# Altium PCB DoubiBot_PCB.PcbDoc
Units mil, origin at the board's own origin, x right, y up, seen from the top; angles counter-clockwise.
Board outline 1350 x 1470 mil, 2 copper layers (Top1, Bottom4), stack 12.8 mil thick; 31 components, 29 nets, 139 pads, 98 vias.
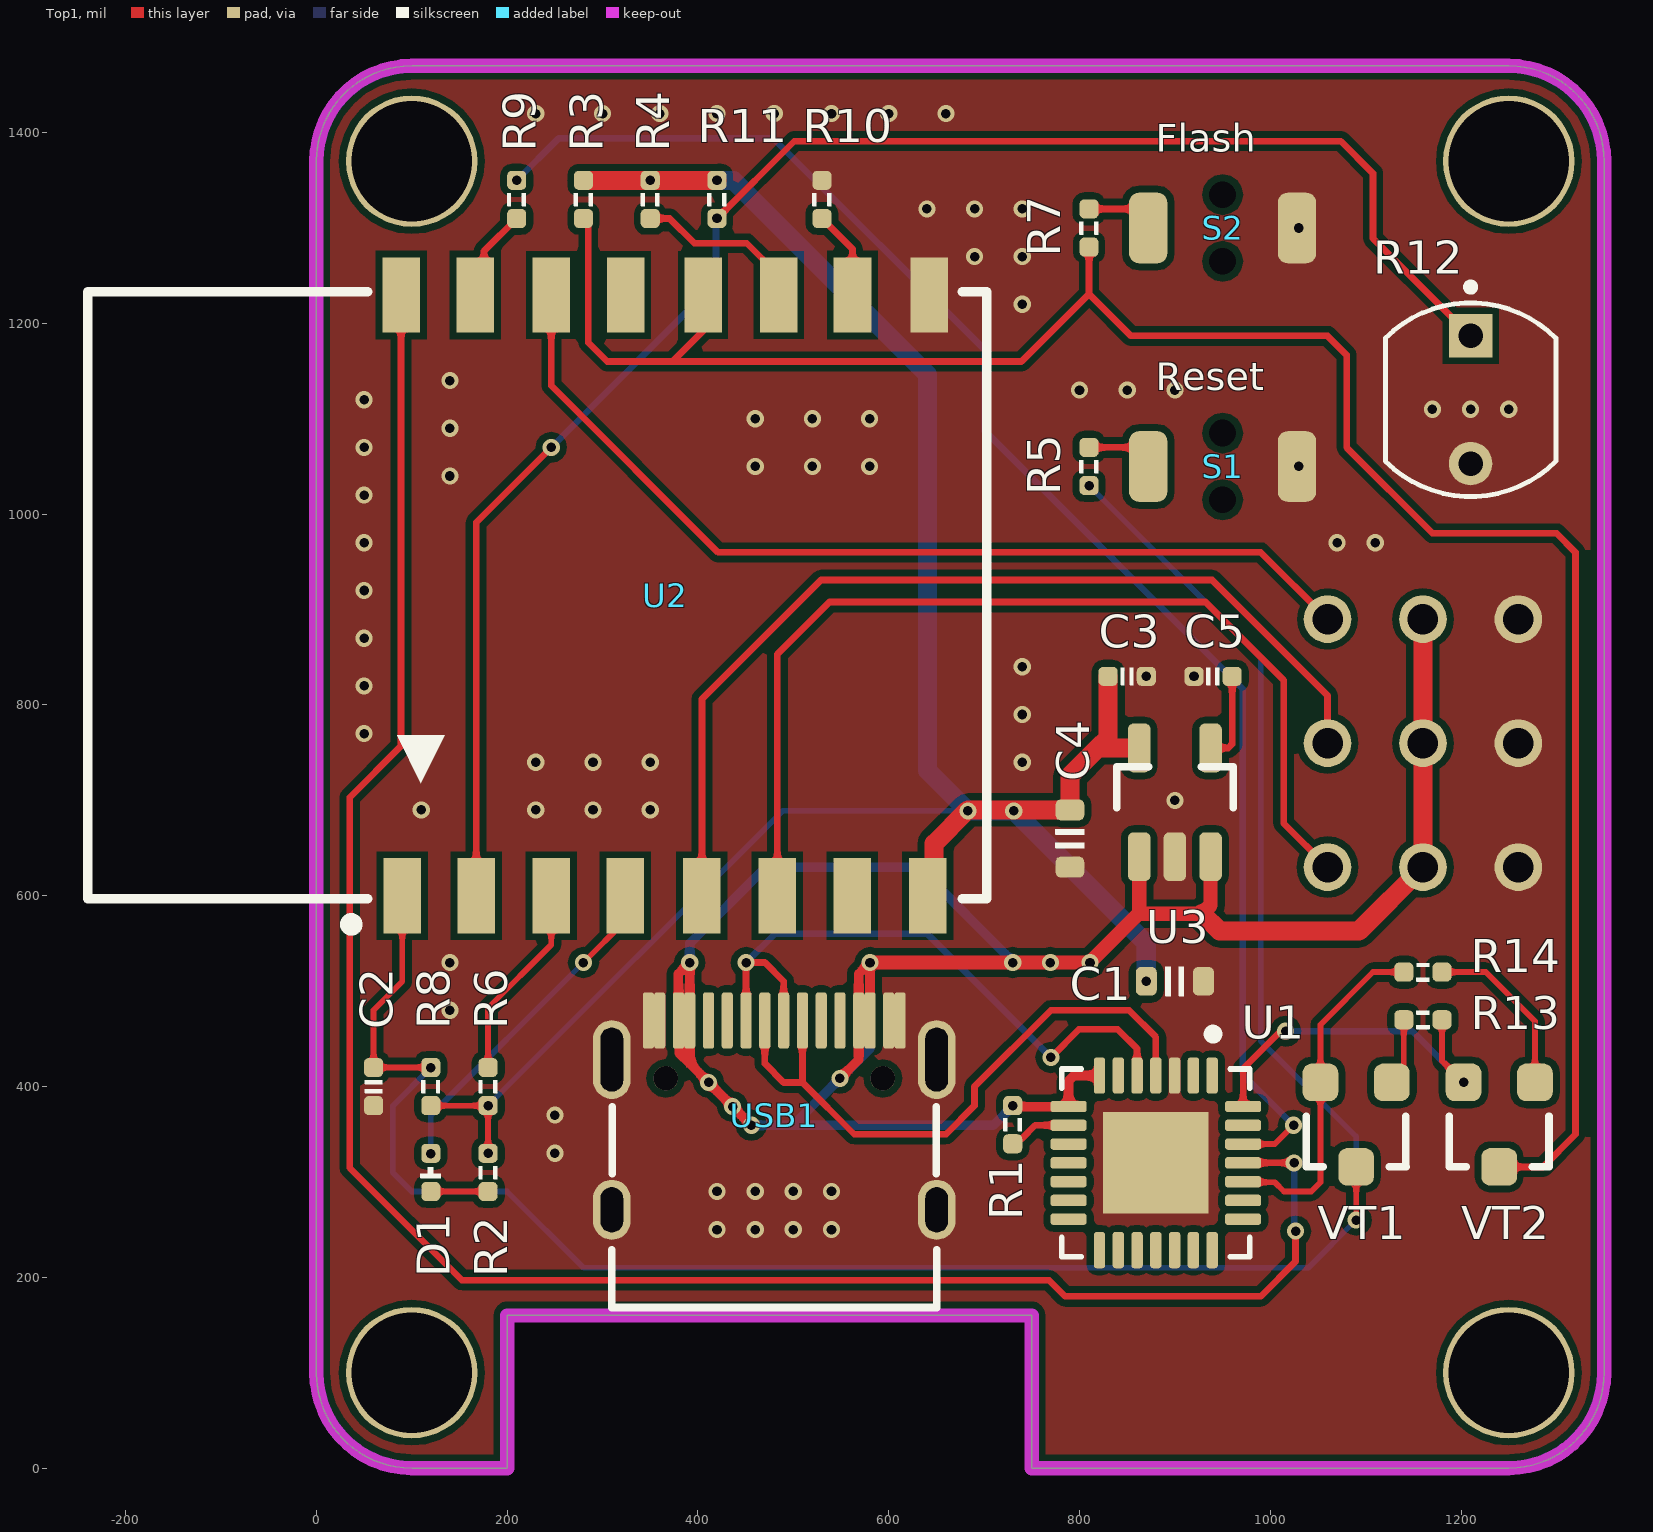
[diagram p0: Top1 view]
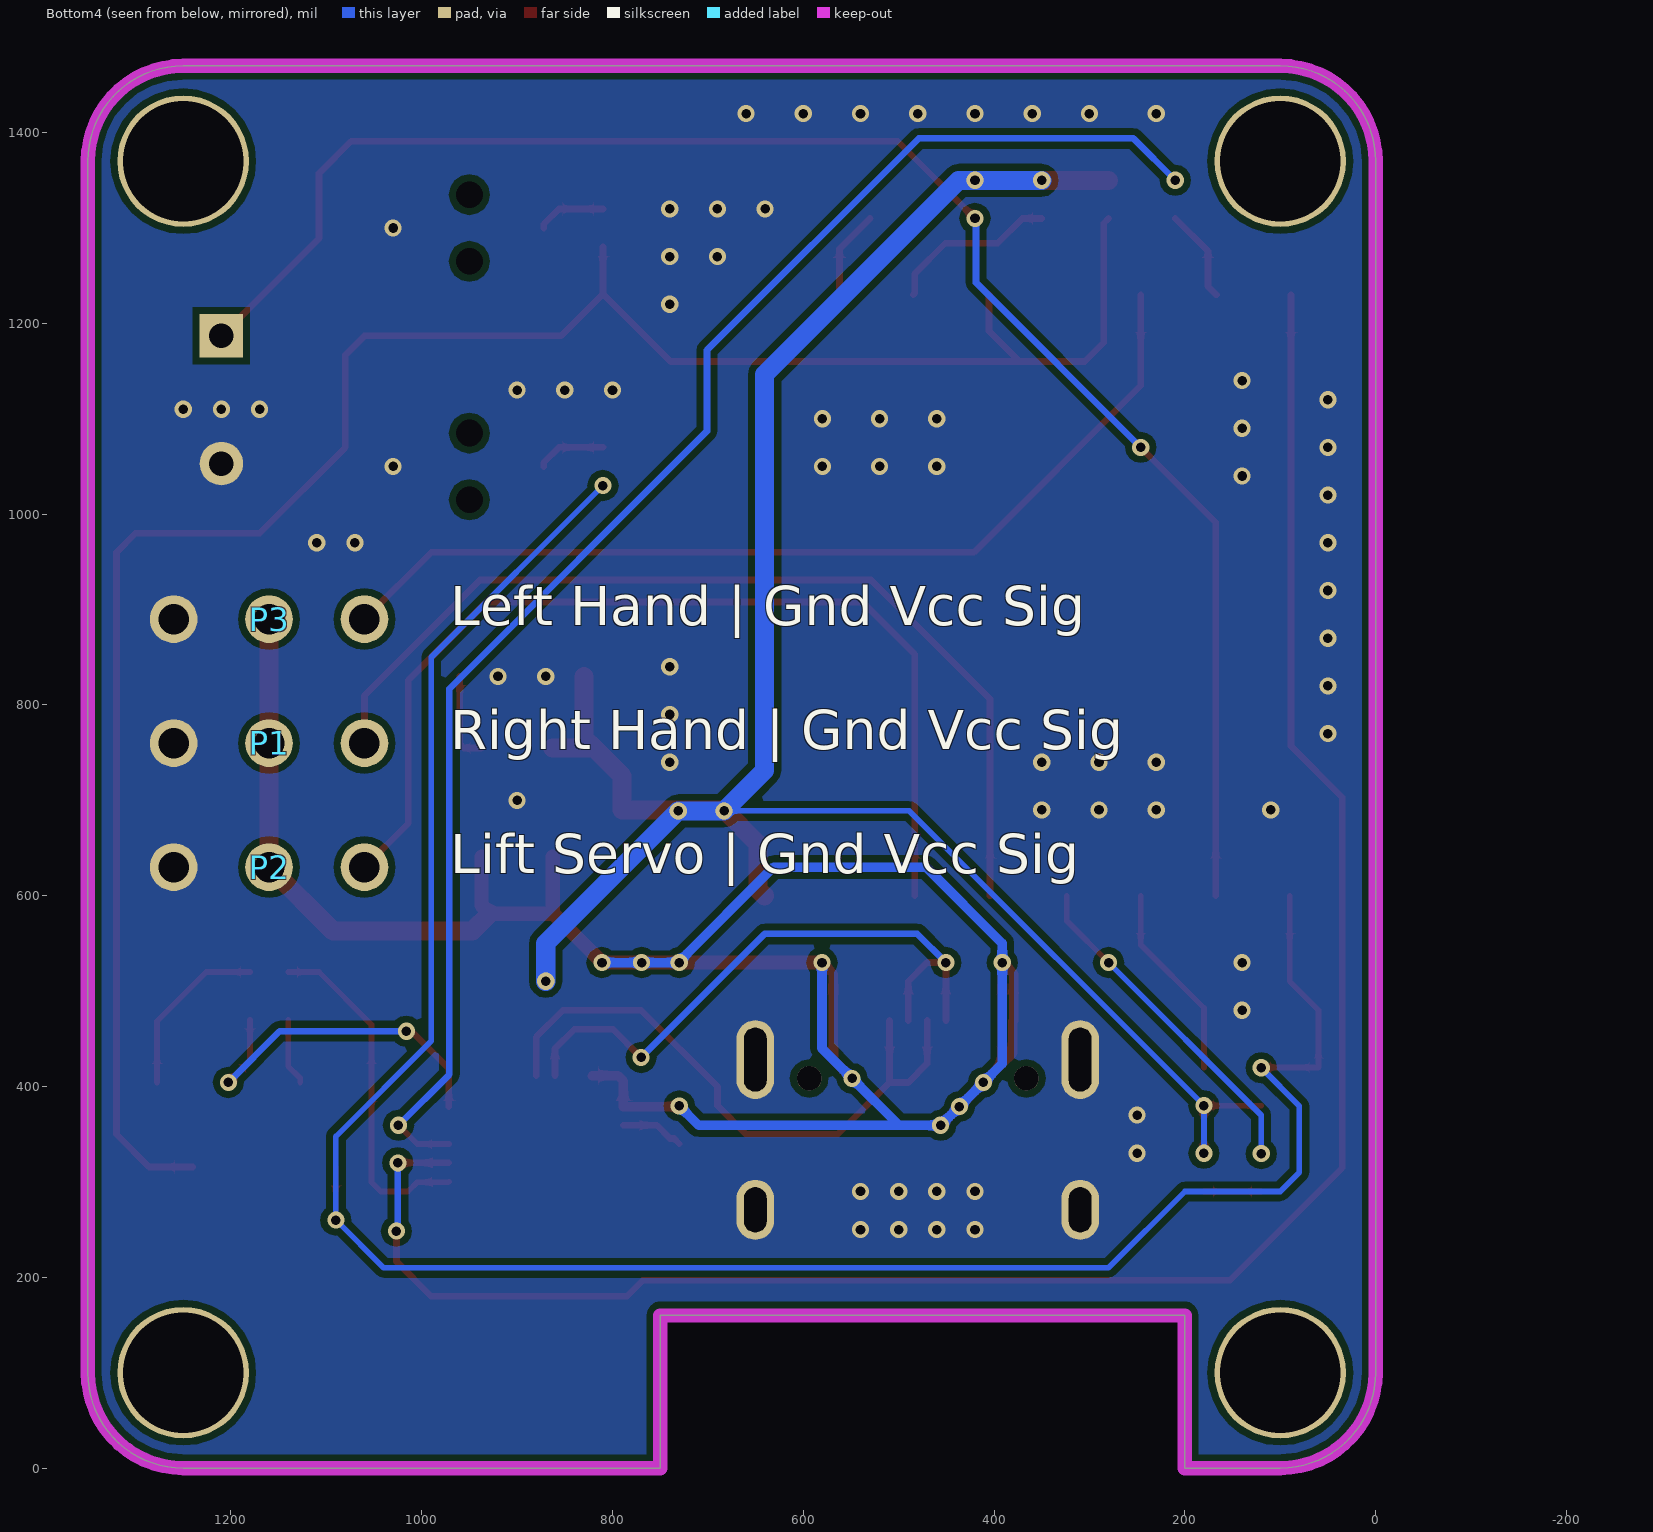
[diagram p1: Bottom4 view, seen from below]
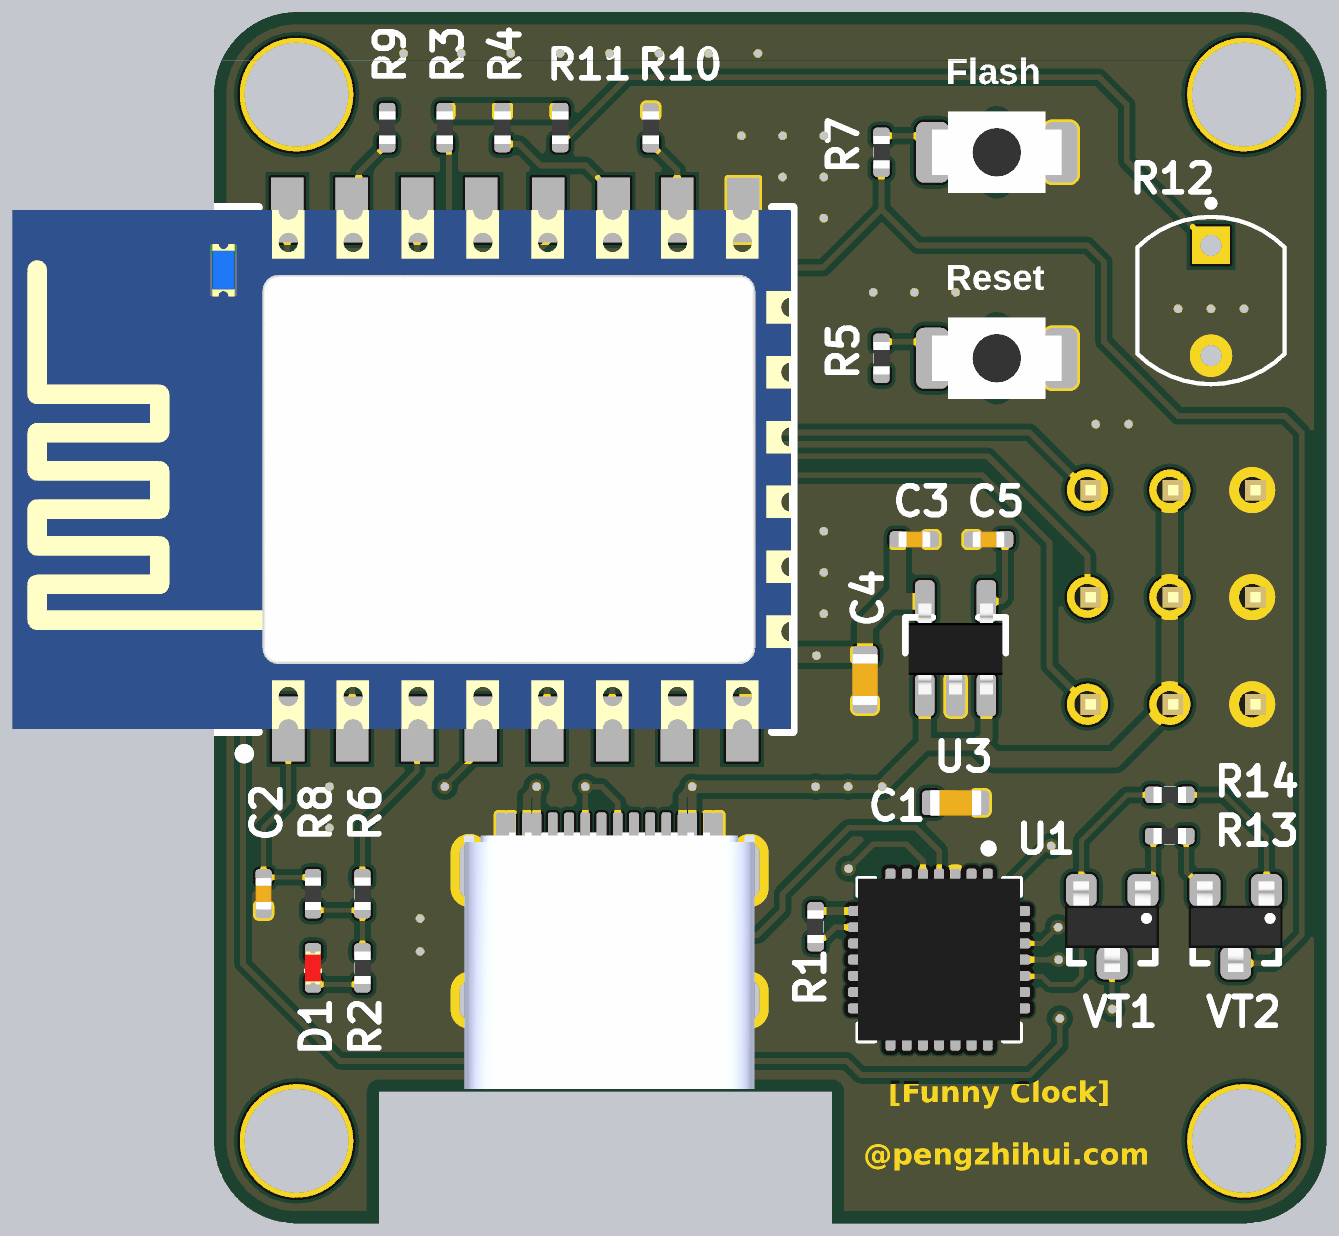
[diagram p2: 3D render of the assembled board from above, using the file's embedded part models]
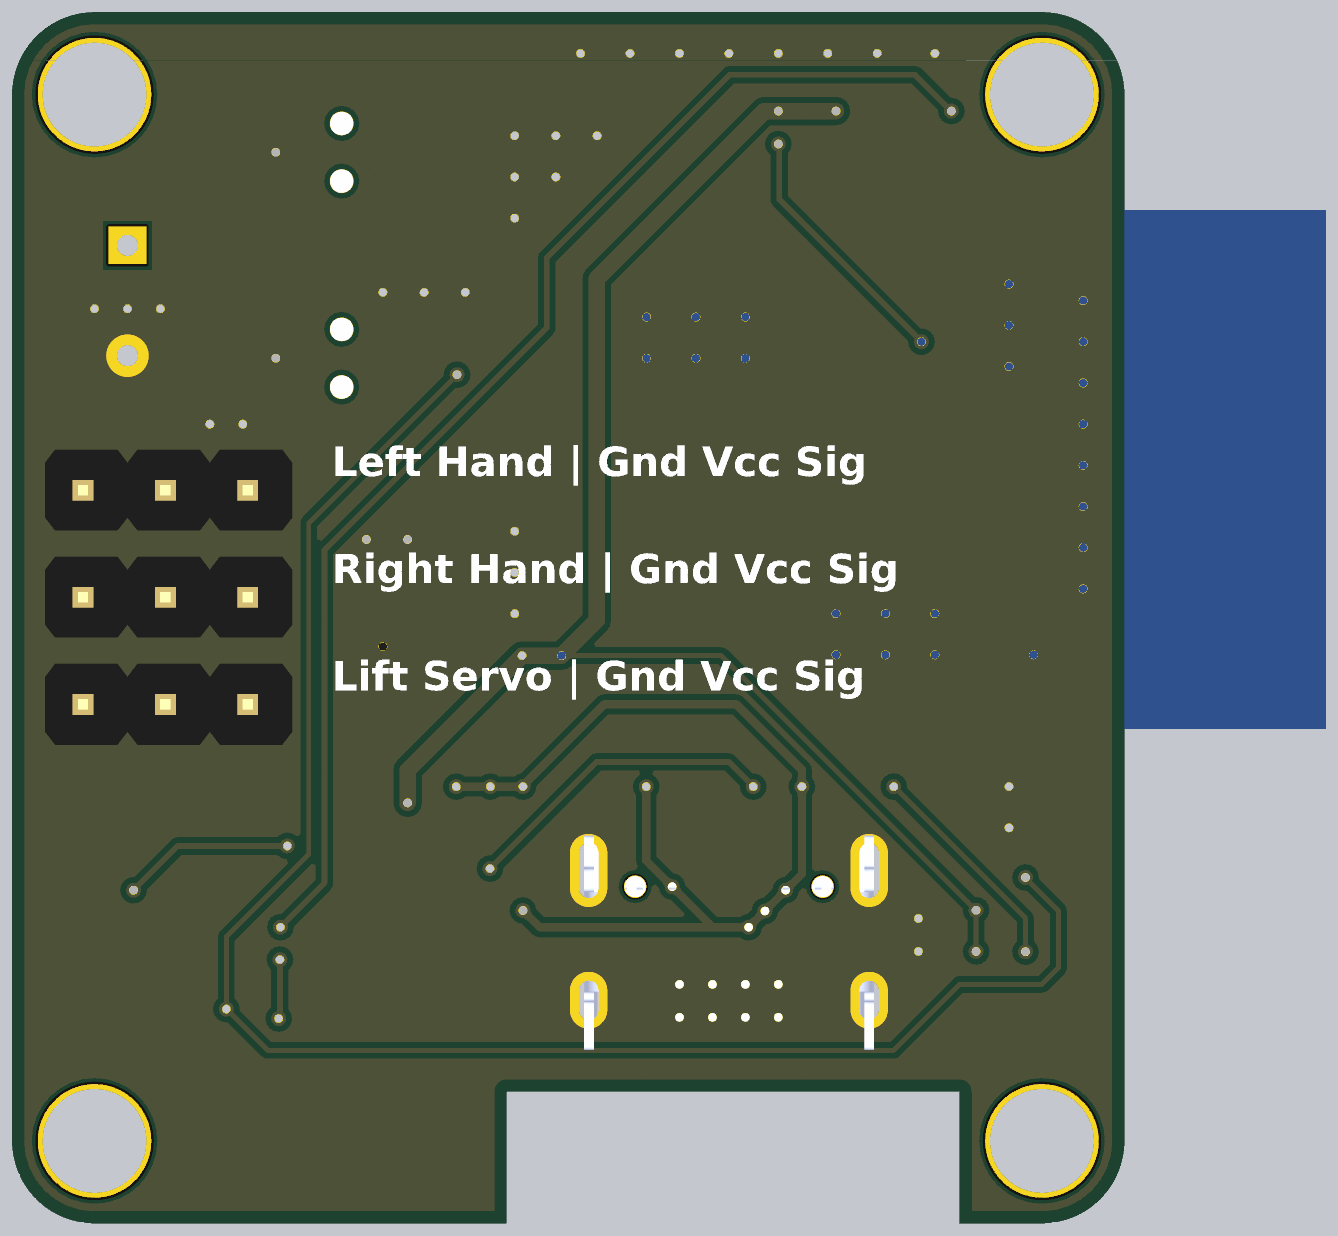
[diagram p3: 3D render of the assembled board from below, using the file's embedded part models]

## Layer stack, top to bottom
Top1: signal copper 1.4
Dielectric: core 10, FR-4, Dk 4.2
Bottom4: signal copper 1.4

## Board outline
0,100 ccw(c100,100) 100,0 200,0 200,160 750,160 750,0 1250,0 ccw(c1250,100) 1350,100 1350,1370 ccw(c1250,1370) 1250,1470 100,1470 ccw(c100,1370) 0,1370

## Design rules (kind name [scope] priority, off if disabled: settings)
Clearance [All] p1: gap=7
ComponentClearance [All] p1: gap=0 collisioncheckmode=3 verticalgap=0 showdistances=FALSE
DiffPairsRouting [All] p1: maxlimit=9 minlimit=9 mostfreqgap=9 maxuncoupledlength=500
FanoutControl Fanout_BGA [All] p1: bgadir=Out bgaviamode=Centered fanoutstyle=Auto fanoutdirection=Alternating viagrid=1 // Fanout_BGA (Default Rule)
HoleSize [All] p1: absolutevalues=TRUE maxlimit=10000 minlimit=8 maxpercent=80.000 minpercent=20.000
MinimumSolderMaskSliver [All] p1 off: minsoldermaskwidth=2
PlaneClearance [All] p1: clearance=8
PlaneConnect [All] p1: planeconnectstyle=Direct reliefexpansion=20 reliefentries=4 reliefconductorwidth=10 reliefairgap=10
PolygonConnect [All] p1: connectstyle=Direct reliefconductorwidth=10 reliefentries=4 polygonreliefangle="90 Angle"
RoutingVias [All] p1: holewidth=8 width=16 viastyle="Through Hole" minholewidth=6 minwidth=12 maxholewidth=28 maxwidth=50
SilkToSilkClearance [All] p1: silktosilkclearance=0
SilkscreenOverComponentPads SilkToSolderMaskClearance [IsPad] p1: minsilkscreentomaskgap=0
SolderMaskExpansion [All] p1: expansion=3
Width [All] p1: maxlimit=10000 minlimit=6 preferedwidth=7
19 further rules are at their usual default settings.

## Components (designator, comment, footprint, x,y, rotation, side; value= is the part's Value field where it differs from the comment)
C1 "10uF" 0603-CAP 900,510.32 r180 top
C2 "0.1uF" CAP_0402 60,400 r90 top
C3 "0.1uF" CAP_0402 850,830 r0 top
C4 "10uF" 0603-CAP 790,660 r270 top
C5 "10nF" CAP_0402 940,830 r0 top
D1 "LED_0402" LED_0402_RED 120,310 r90 top
P1 "HDR1x3_2.54" HDR1X3_2.54_180 1060,760 r270 bottom
P2 "HDR1x3_2.54" HDR1X3_2.54_180 1060,630 r270 bottom
P3 "HDR1x3_2.54" HDR1X3_2.54_180 1060,890 r270 bottom
R1 "10K" RES_0402 730,360 r90 top
R2 "1K" RES_0402 180,310 r90 top
R3 "12K" RES_0402 280,1330 r270 top
R4 "12K" RES_0402 350,1330 r270 top
R5 "470R" RES_0402 810,1050 r270 top
R6 "12K" RES_0402 180,400 r90 top
R7 "470R" RES_0402 810,1300 r270 top
R8 "12K" RES_0402 120,400 r90 top
R9 "200R" RES_0402 210,1330 r270 top
R10 "12K" RES_0402 530,1330 r270 top
R11 "1K" RES_0402 420,1330 r90 top
R12 "PDV-P8103" *PHODET_PDV-P8103 1210,1120 r270 top
R13 "12K" RES_0402 1160,470 r0 top
R14 "12K" RES_0402 1160,520 r180 top
S1 "ButtonTACT_3x4x2_180" ButtonTACT_3x4x2_180H 950,1050 r0 top
S2 "ButtonTACT_3x4x2_180" ButtonTACT_3x4x2_180H 950,1300 r0 top
U1 "CP2102" QFN-28 880,320 r270 top
U2 "ESP-8266" ESP-8266 90,600 r90 top
U3 "LP2992" SOT23-5 900,700 r90 top
USB1 "Type-C" Type-C-TOP 480,370 r270 top
VT1 "S8050" SMT_TRIODE_NPN 1090,360 r180 top
VT2 "S8050" SMT_TRIODE_NPN 1240,360 r180 top

## Footprints (in the part's own frame and the unit in brackets; to place one, negate y for a bottom-side part, rotate by r counter-clockwise, add the part's x,y. Pads: shape width x height; smd on the part's side, far side on the other; paste and mask are expansions set on the pad)
0603-CAP [mil]
  rrect50% 22x30 smd: 1(-30,0) 2(30,0)
  silkscreen extent -10,-15 10,15, body extent -31,-16 32,16, height 31
*PHODET_PDV-P8103 [mm]
  rect 1.158x1.158 hole 0.65: 1(-1.7,0)
  round 1.158 hole 0.65: 2(1.7,0)
  silkscreen extent -3.1,-2.27 2.58,2.27
ButtonTACT_3x4x2_180H [mil]
  round 0 hole 28: 0(0,-35) 0(0,35)
  rrect50% 40x74 smd: 1(-78,0) 2(78,0)
  body extent -79,-49 79,49, height 63
CAP_0402 [mil]
  rrect50% 20x20 smd: 1(-20,0) 2(20,0)
  silkscreen extent -7,-9 7,9, body extent -20,-10 20,10, height 20
ESP-8266 [mm]
  rect 2x1 smd: 1(0,0) 2(0,-1.97) 3(0,-3.97) 4(0,-5.94) 5(0,-7.98) 6(0,-9.99) 7(0,-11.98) 8(0,-13.99) 9(16,-14.03) 10(16,-11.99) 11(16,-10.03) 12(16,-8.01) 13(16,-5.95) 14(16,-3.97) 15(16,-1.95) 16(16,0.03)
  silkscreen extent -0.91,-15.57 16.08,8.37, body extent 0,-15.5 16,8.5, height 2.75
HDR1X3_2.54_180 [mil]
  round 50 hole 32: 1(0,0) 2(0,-100) 3(0,-200)
  body extent -49,-250 49,50, height 323
LED_0402_RED [mil]
  rrect50% 20x20 smd: 1(-20,0) 2(20,0)
  silkscreen extent -6,-10 6,10, body extent -20,-10 20,10, height 18
QFN-28 [mil]
  rrect50% 38x12 smd mask+5: 1(-91.5,59.06) 2(-91.5,39.37) 3(-91.5,19.69) 4(-91.5,0) 5(-91.5,-19.68) 6(-91.5,-39.37) 7(-91.5,-59.06) 15(91.5,-59.06) 16(91.5,-39.37) 17(91.5,-19.68) 18(91.5,0) 19(91.5,19.69) 20(91.5,39.37) 21(91.5,59.06)
  rrect50% 12x38 smd mask+5: 8(-59.06,-91.5) 9(-39.37,-91.5) 10(-19.69,-91.5) 11(0,-91.5) 12(19.68,-91.5) 13(39.37,-91.5) 14(59.06,-91.5) 22(59.06,91.5) 23(39.37,91.5) 24(19.68,91.5) 25(0,91.5) 26(-19.69,91.5) 27(-39.37,91.5) 28(-59.06,91.5)
  rect 106.3x110.24 smd: 29(0,0)
  silkscreen extent -140,-99 99,99, body extent -99,-99 98,98, height 35
RES_0402 [mil]
  rrect50% 20x20 smd: 1(-20,0) 2(20,0)
  silkscreen extent -7,-10 7,10, body extent -20,-10 20,10, height 14
SMT_TRIODE_NPN [mm] "Surface mount NPN transistor, package SOT-23"
  rrect50% 0.95x1 smd: 1(-0.95,-1.125) 2(0.95,-1.125) 3(0,1.125)
  silkscreen extent -1.33,-0.22 1.32,1.13, body extent -1.45,-1.4 1.45,1.4, height 1.3
SOT23-5 [mm] "SOT23, 3-Leads, Body 3.1x3.0mm (max), Pitch 0.95mm, IPC Medium Density"
  rrect50% 1.3x0.6 smd: 1(-1.5,0.95) 2(-1.5,0) 3(-1.5,-0.95) 4(1.396,-0.95) 5(1.396,0.95)
  silkscreen extent -0.2,-1.55 0.9,1.55, body extent -1.48,-1.45 1.32,1.45, height 1.2
Type-C-TOP [mm]
  round 0.65 hole 0.65: 0(-0.98,2.89) 0(-0.98,-2.89)
  oval 1.6x1 hole 0.6 slot 1.2 at 0 deg: 1(2.52,4.325) 2(2.52,-4.325)
  oval 2.1x1 hole 0.6 slot 1.7 at 0 deg: 3(-1.48,-4.325) 4(-1.48,4.325)
  rrect50% 1.5x0.3 smd: A1(-2.52,-3.35) A4(-2.52,-2.55) A5(-2.52,-1.25) A6(-2.52,-0.25) A7(-2.52,0.25) A8(-2.52,1.25) A9(-2.52,2.55) A12(-2.52,3.35) B1(-2.52,3.05) B4(-2.52,2.25) B5(-2.52,1.75) B6(-2.52,0.75) B7(-2.52,-0.75) B8(-2.52,-1.75) B9(-2.52,-2.25) B12(-2.52,-3.05)
  silkscreen extent -0.22,-4.33 5.12,4.33, body extent -2.64,-4.48 5.26,4.46, height 3.28

## Part data
C1 C4: library part 电容-0603, "Capacito"
C2 C3 C5: library part 电容-0402, "Capacito"
D1: "LED"
P1 P2 P3: "Header"
R1 R2 R3 R4 R5 R6 R7 R8 R9 R10 R11 R13 R14: library part 电阻-0402, "Resisto"
R12: "Photocell 16-33kohm"
S1 S2: "Button"
U1: "USBתTTL"
U3: "LDO"
USB1: library part USB-Type-C-TOP
VT1 VT2: library part SMT_TRIODE_NPN, "Surface mount NPN transistor, package SOT-23"

## Free pads (board coordinates)
  round 137.8 hole 125.98: 9(100,100) 10(100,1370) 11(1250,1370) 12(1250,100)

## Via types
v1: diameter 18, hole 10, Top1 to Bottom4, tented both sides, 98 vias

## Nets (pads, with @x,y where several pads share a name; then routed paths per layer and width w, separated by ;. In a path a pad name is that pad's centre, name@x,y a point inside that pad or via, vN(x,y) a via of type N, cw(c..) or ccw(c..) an arc to the next point about the centre after c; other vN are vias at no path point)
3V3: C1.2 C3.1 C4.1 R2.2 R3.1 R4.1 R6.1 R8.1 R11.2 U2.8 U3.5 | length 2479.5
  Top1 w6: R8.1 v1(180,380) v1(180,330)
  Top1 w20: R3.1 v1(350,1350) v1(420,1350) ; U2.8 647.63,606.85 647.63,654.63 683,690 C4.1 790,725.64 819.3,754.94 ; C3.1 830,765.64 819.3,754.94 ; U3.5 819.3,754.94
  Bottom4 w6: v1(180,330) v1(180,380) 489,689 v1(683,689)
  Bottom4 w20: v1(350,1350) v1(420,1350) 437,1350 640.47,1146.53 640.47,731.53 v1(683,689) v1(731.08,689) 870,550.08 v1(870,510.32)
ADC: R11.1 R12.1 U2.2 | length 1762.5
  Top1 w7: U2.2 167.56,991.26 v1(246.3,1070) ; v1(420,1310) 501,1391 1074,1391 1107.75,1357.25 1107.75,1289.18 R12.1
  Bottom4 w7: v1(246.3,1070) 419,1242.7 419,1309 v1(420,1310)
CP_Rx: U1.25 U2.16 | length 2159.6
  Top1 w7: U2.16 88.82,756.82 35,703 35,314.76 152.76,197 768,197 785,180 990,180 1026.5,216.5 v1(1026.5,248.48) ; U1.25 v1(1025,320)
  Bottom4 w7: v1(1025,320) 1025,249.98 v1(1026.5,248.48) v1@1028,246.98
CP_Tx: R9.2 U2.15 | length 98
  Top1 w7: U2.15 175.69,1238.84 175.69,1275.69 R9.2
DTR: R13.2 U1.28 VT2.2 | length 384.3
  Top1 w6: R13.2 1180,426.89 v1(1202.6,404.29)
  Top1 w7: U1.28 971.5,418.63 1010.87,458 v1(1016,458)
  Bottom4 w7: v1(1016,458) 1148.89,458 v1(1202.6,404.29)
EN: R6.2 U2.3 | length 207.5
  Top1 w6: R6.2 180,482.25 246.3,548.55 U2.3
GND: C1.1 C2.1 C3.2 C4.2 C5.1 P1.3 P2.3 P3.3 R10.1 R12.2 S1.2 S2.2 U1.3 U1.29 U2.9 U3.2 USB1.1 USB1.2 USB1.3 USB1.4 USB1.A1 USB1.A12 USB1.B1 USB1.B12
  other v1: 420,250 460,250 500,250 540,250 420,290 460,290 500,290 540,290 250,330 250,370 140,480 140,530 110,690 230,690 290,690 350,690 900,700 230,740 290,740 350,740 740,740 50,770 740,790 50,820 870,830 920,830 740,840 50,870 50,920 50,970 1070,970 1110,970 50,1020 140,1040 460,1050 520,1050 580,1050 1030,1050 50,1070 140,1090 460,1100 520,1100 580,1100 1170,1110 1210,1110 1250,1110 50,1120 800,1130 850,1130 900,1130 140,1140 740,1220 690,1270 740,1270 1030,1300 640,1320 690,1320 740,1320 230,1420 300,1420 360,1420 420,1420 480,1420 540,1420 600,1420 660,1420
GPIO0: R3.2 R7.2 U2.12 VT2.3 | length 2210.2
  Top1 w7: R3.2 285,1305 285,1180 305,1160 373.42,1160 ; U2.12 405.35,1191.93 373.42,1160 ; R7.2 810,1230.94 ; VT2.3 1285.71,315.71 1320,350 1320,960 1300,980 1170,980 1080,1070 1080,1166.93 1060,1186.93 854.02,1186.93 810,1230.94 ; 373.42,1160 739.06,1160 810,1230.94
GPIO2: R4.2 U2.11 | length 180
  Top1 w7: R4.2 370.35,1310 396.35,1284 451.16,1284 483.31,1251.85 483.31,1231.5 U2.11
GPIO4: U2.13
GPIO5: P3.1 U2.14 | length 1010.2
  Top1 w7: U2.14 246.3,1134.92 421.22,960 990,960 P3.1
GPIO12: P2.1 U2.6 | length 1055.7
  Top1 w7: U2.6 483.31,853.31 538,908 932,908 1014,826 1014,676 P2.1
GPIO13: U2.7
GPIO14: P1.1 U2.5 | length 1013.8
  Top1 w7: U2.5 404.17,806.17 529,931 939,931 1060,810 P1.1
GPIO15: R10.2 U2.10 | length 93.4
  Top1 w7: R10.2 562.05,1277.95 U2.10
GPIO16: D1.2 U2.4 | length 354.8
  Top1 w6: v1(280,530) 323.86,573.86 U2.4
  Bottom4 w6: v1(120,329.69) 120,370 v1(280,530)
NetC5_2: C5.2 U3.4 | length 95.3
  Top1 w7: U3.4 955.9,754.94 960,759.05 C5.2
NetD1_1: D1.1 R2.1 | length 60
  Top1 w6: D1.1 R2.1
NetR1_1: R1.1 U1.9 | length 66.5
  Top1 w7: R1.1 735.57,345.57 739.73,345.57 753.53,359.37 U1.9
NetR5_1: R5.1 S1.1 | length 72.6
  Top1 w7: R5.1 855.99,1070 872,1053.99 S1.1
NetR7_1: R7.1 S2.1 | length 72.6
  Top1 w7: R7.1 855.99,1320 872,1303.99 S2.1
NetR9_1: R9.1 U1.26 | length 1608.8
  Top1 w6: U1.26 1004.69,339.69 v1(1024.37,359.37)
  Bottom4 w7: v1(210,1350) 254,1394 479,1394 701,1172 701,1087 971,817 971,412.74 v1(1024.37,359.37)
NetR13_1: R13.1 VT1.1 | length 70.9
  Top1 w6: VT1.1 1127.4,408.71 1140,421.31 R13.1
NetR14_1: R14.1 VT2.1 | length 182.9
  Top1 w6: R14.1 1225.87,520 1277.4,468.47 VT2.1
nRST: C2.2 R5.2 R8.2 U2.1 VT1.3 | length 2392.5
  Top1 w6: U2.1 90,510 60,480 C2.2 R8.2 ; v1(1090,260) VT1.3
  Bottom4 w6: v1(120,419.69) 80,379.69 80,310 100,290 200,290 280,210 1040,210 v1(1090,260) 1090,347.74 990,447.74 990,850 v1(810,1030)
RTS: R14.2 U1.24 VT1.2 | length 364.7
  Top1 w6: U1.24 972.05,299.76 1004.69,299.76 1014.45,290 1042.83,290 1052.6,299.76 VT1.2 1052.6,464.85 1107.75,520 R14.2
USB-PWR-DM: U1.5 USB1.A7 USB1.B7 | length 674.2
  Top1 w7: USB1.B7 v1(450.47,530) 470.16,530 489.84,510.32 USB1.A7 ; v1(770,430.47) 799.53,460 800,460 840,460 860.32,439.69 U1.5
  Bottom4 w7: v1(450.47,530) 480.47,560 640.47,560 v1(770,430.47)
USB-PWR-DP: U1.4 USB1.A6 USB1.B6 | length 668.2
  Top1 w7: USB1.A6 470.16,423.98 489.84,404.29 509.53,404.29 ; USB1.B6 509.53,404.29 ; U1.4 880,451.81 851.81,480 770,480 690,400 690,380 660,350 563.82,350 509.53,404.29
VDD_5V: P1.2 P2.2 P3.2 R1.2 U1.7 U1.8 U3.1 U3.3 USB1.A4 USB1.A9 USB1.B4 USB1.B9 | length 2844.5
  Top1 w10: v1(456.02,359.37) v1(436.34,379.06) v1(411.1,404.29) 391.42,423.98 ; v1(548.9,408.58) 568.58,428.27 USB1.B4 568.58,518.19 v1(580.39,530) USB1.A9 ; R1.2@730.94,379.06 U1.8 788.5,405.64 794.36,411.5 U1.7 ; 391.42,423.98 USB1.B9 v1(391.42,530) 379.61,518.19 USB1.A4 380.35,468.47 380.35,435.04 391.42,423.98
  Top1 w15: v1(580.39,530) v1(730,530) v1(769.53,530) 810.6,530 862.6,582 ; U3.1 862.6,582 ; U3.3 937.4,590.05 928.61,581.26 863.34,581.26 862.6,582
  Top1 w20: 928.61,581.26 946.88,563 1093,563 P2.2 P1.2 P3.2
  Bottom4 w10: v1(580.39,530) 580.39,440.08 v1(548.9,408.58) 499.68,359.37 ; v1(730,379.69) 709.69,359.37 499.68,359.37 ; v1(811,530) v1(769.53,530) 731.08,530 631.08,630 471.34,630 391.42,550.08 v1(391.42,530) 391.42,423.98 v1(411.1,404.29) v1(436.34,379.06) v1(456.02,359.37) 499.68,359.37
pads on no net: S1.0 S2.0 U1.1 U1.2 U1.6 U1.10 U1.11 U1.12 U1.13 U1.14 U1.15 U1.16 U1.17 U1.18 U1.19 U1.20 U1.21 U1.22 U1.23 U1.27 USB1.0 USB1.A5 USB1.A8 USB1.B5 USB1.B8

## Polygon pours and split planes (outlines as drawn)
no net on Top1 "Top1-No Net" (solid, remove dead copper, pour order 0): 0,0
GND on Top1 "Top1-No Net" (solid, remove dead copper, pour order 2): -100,1550 1450,1550 1450,-100 -100,-100
GND on Bottom4 "Top1-No Net" (solid, remove dead copper, pour order 4): -100,1550 1450,1550 1450,-100 -100,-100

## Keep-outs
Keep-Out Layer:
  the board outline again, w15

## Silkscreen, mask and mechanical layers (free items; w line width, h text height)
Top Overlay:
  text "Flash" at 880,1370 h50
  text "Reset" at 880,1120 h50
Bottom Overlay:
  text "Left Hand | Gnd Vcc Sig" at 970,870 h70
  text "Right Hand | Gnd Vcc Sig" at 970,740 h70
  text "Lift Servo | Gnd Vcc Sig" at 970,610 h70
Top Solder:
  text "[Funny Clock]" at 810,110 h50
  text "@pengzhihui.com" at 780,40 h50